# Altium PCB Arduino MEGA blank shield.pcbdoc
Units mil, origin at the board's own origin, x right, y up, seen from the top; angles counter-clockwise.
Board outline 4000 x 2100 mil, 2 copper layers (Top Layer, Bottom Layer); 8 components, 79 nets, 94 pads, 0 vias.
Unrouted connection lines stored in the file: 9.
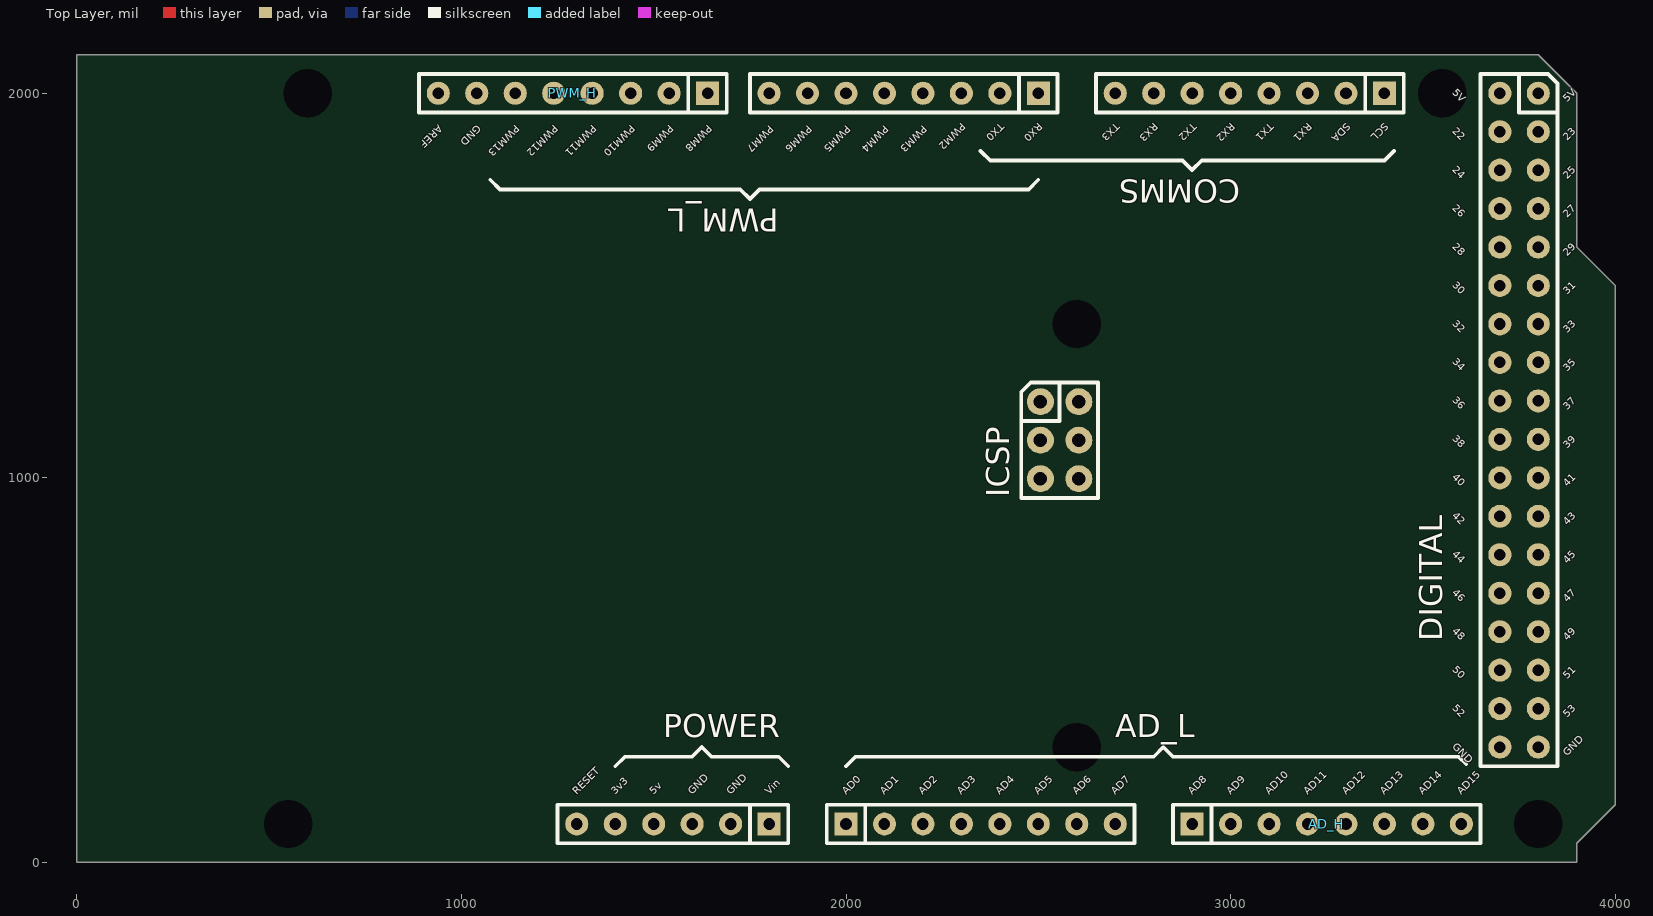
[diagram p0: Top Layer view]
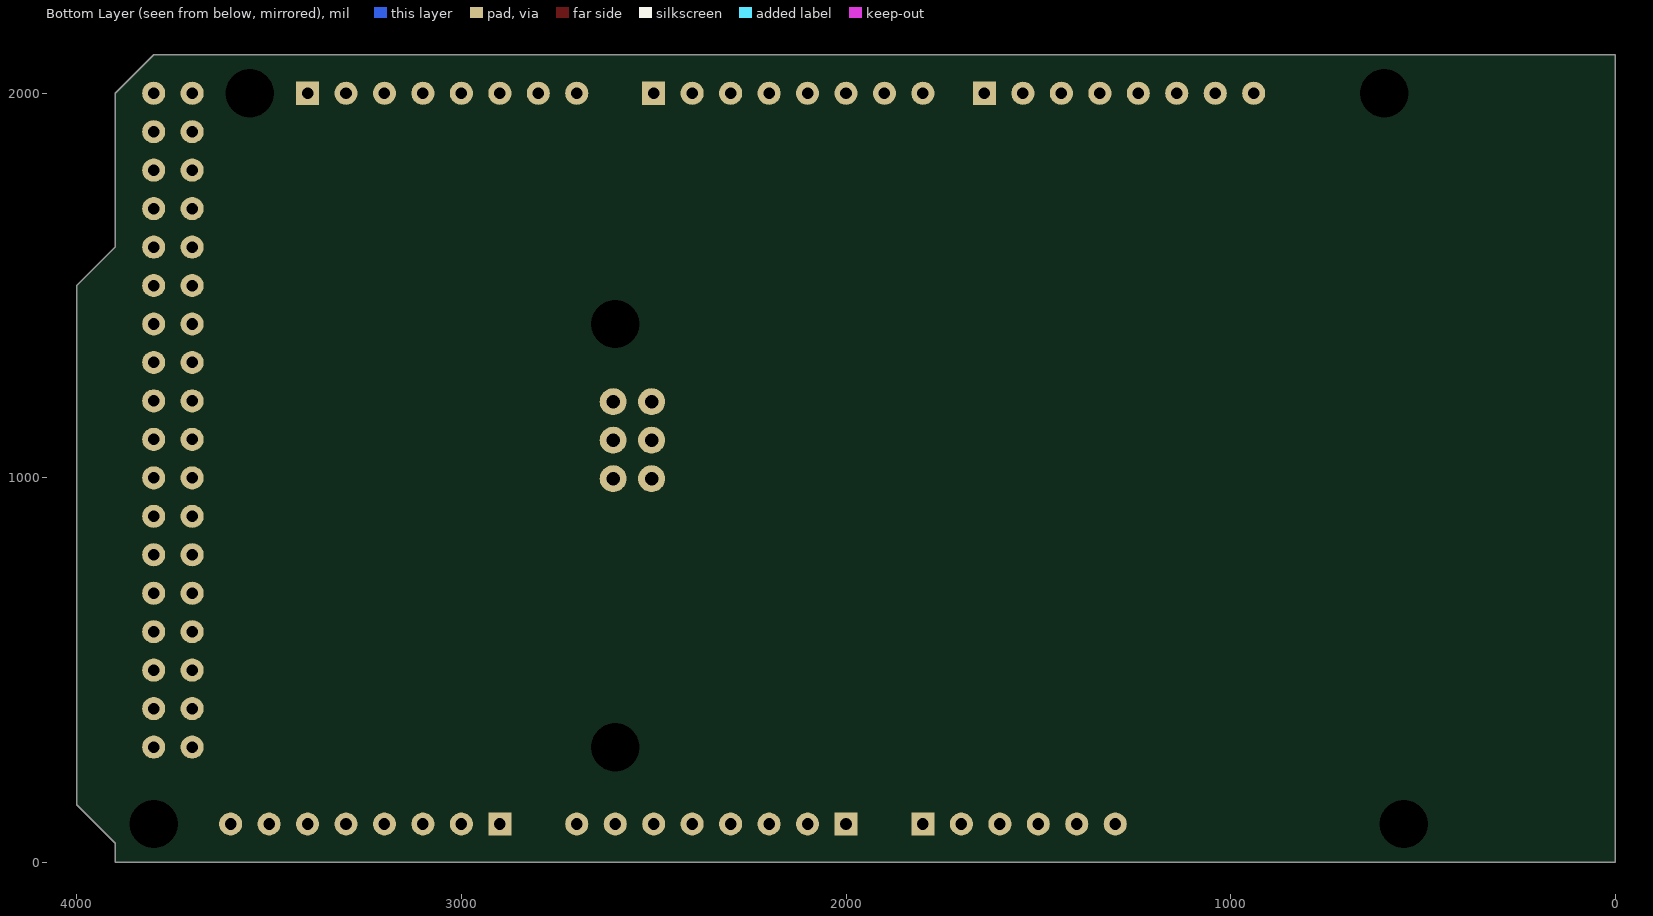
[diagram p1: Bottom Layer view, seen from below]

## Layer stack, top to bottom
Top Layer: signal copper 1.4
Dielectric: dielectric 12.6, FR-4, Dk 4.8
Bottom Layer: signal copper 1.4

## Board outline
0,0 0,2100 3800,2100 3900,2000 3900,1600 4000,1500 4000,150 3900,50 3900,0

## Design rules (kind name [scope] priority, off if disabled: settings)
Clearance [All] p1: gap=10
PolygonConnect [All] p1: connectstyle=Relief reliefconductorwidth=10 reliefentries=4 polygonreliefangle="90 Angle" airgapwidth=10
RoomDefinition AdruinoMegaSheild [InComponentClass('AdruinoMegaSheild')] p1: confinementstyle=ConfineOut formatcopy=TRUE lockcomponents=FALSE outline 4200,900 4750,900 4750,1080 4200,1080
RoutingVias [All] p1: holewidth=28 width=50 viastyle="Through Hole" minholewidth=28 minwidth=50 maxholewidth=28 maxwidth=50
SilkscreenOverComponentPads [All] p1: minsilkscreentomaskgap=10
SolderMaskExpansion [All] p1: expansion=4
Width [All] p1: maxlimit=10 minlimit=10 preferedwidth=10
27 further rules are at their usual default settings.

## Components (designator, comment, footprint, x,y, rotation, side; value= is the part's Value field where it differs from the comment)
AD_H "AD_H" "Header 8x1 8.5mm" 2900,100 r0 top locked
AD_L "AD_L" "Header 8x1 8.5mm" 2000,100 r0 top locked
COMMS "Communication" "Header 8x1 8.5mm" 3400,2000 r180 top
DIGITAL "IO_36" "HEADER 36X 8MM" 3800,2000 r270 top locked
ICSP "ICSP" ICSP 2505.51,1198.03 r0 top locked
POWER "POWER" "Header 6x1 8.5mm" 1800,100 r180 top locked
PWM_H "PWM_H" "Header 8x1 8.5mm" 1640,2000 r180 top locked
PWM_L "PWM_L" "Header 8x1 8.5mm" 2500,2000 r180 top locked

## Footprints (in the part's own frame and the unit in brackets; to place one, negate y for a bottom-side part, rotate by r counter-clockwise, add the part's x,y. Pads: shape width x height; smd on the part's side, far side on the other; paste and mask are expansions set on the pad)
"Header 6x1 8.5mm" [mil] "Stackable 6 pin header"
  rect 60x60 hole 30: 1(0,0)
  round 60 hole 30: 2(100,0) 3(200,0) 4(300,0) 5(400,0) 6(500,0)
  silkscreen extent -50,-50 550,50, body extent -50,-50 550,50, height 335
"Header 8x1 8.5mm" [mil] "Stackable 8 pin header"
  rect 60x60 hole 30: 1(0,0)
  round 60 hole 30: 2(100,0) 3(200,0) 4(300,0) 5(400,0) 6(500,0) 7(600,0) 8(700,0)
  silkscreen extent -50,-50 750,50, body extent -50,-50 750,50, height 335
"HEADER 36X 8MM" [mil] "Stackable 10 pin header"
  round 60 hole 30: 1(0,0) 2(0,-100) 3(100,0) 4(100,-100) 5(200,0) 6(200,-100) 7(300,0) 8(300,-100) 9(400,0) 10(400,-100) 11(500,0) 12(500,-100) 13(600,0) 14(600,-100) 15(700,0) 16(700,-100) 17(800,0) 18(800,-100) 19(900,-100) 20(900,0) 21(1000,0) 22(1000,-100) 23(1100,0) 24(1100,-100) 25(1200,0) 26(1200,-100) 27(1300,0) 28(1300,-100) 29(1400,0) 30(1400,-100) 31(1500,0) 32(1500,-100) 33(1600,0) 34(1600,-100) 35(1700,0) 36(1700,-100)
  silkscreen extent -50,-150 1750,50, body extent -50,-150 1750,50, height 335
ICSP [mil]
  round 70 hole 35.43: 1(0,0) 2(100,0) 3(0,-100) 4(100,-100) 5(0,-200) 6(100,-200)
  silkscreen extent -50,-250 150,50, body extent -50,-250 150,50, height 485

## Free pads (board coordinates)
  round 62.99 hole 125.98: 0(550,100) 0(600,2000) 0(2600,300) 0(2600,1400) 0(3550,2000) 0(3800,100)

## Nets (pads, with @x,y where several pads share a name; then routed paths per layer and width w, separated by ;. In a path a pad name is that pad's centre, name@x,y a point inside that pad or via, vN(x,y) a via of type N, cw(c..) or ccw(c..) an arc to the next point about the centre after c; other vN are vias at no path point)
3V3: POWER.5
5V: DIGITAL.1 DIGITAL.2 ICSP.2 POWER.4
AD0: AD_L.1
AD1: AD_L.2
AD2: AD_L.3
AD3: AD_L.4
AD4: AD_L.5
AD5: AD_L.6
AD6: AD_L.7
AD7: AD_L.8
AD8: AD_H.1
AD9: AD_H.2
AD10: AD_H.3
AD11: AD_H.4
AD12: AD_H.5
AD13: AD_H.6
AD14: AD_H.7
AD15: AD_H.8
AREF: PWM_H.8
GND: DIGITAL.35 DIGITAL.36 ICSP.6 POWER.2 POWER.3 PWM_H.7
IO22: DIGITAL.3
IO23: DIGITAL.4
IO24: DIGITAL.5
IO25: DIGITAL.6
IO26: DIGITAL.7
IO27: DIGITAL.8
IO28: DIGITAL.9
IO29: DIGITAL.10
IO30: DIGITAL.11
IO31: DIGITAL.12
IO32: DIGITAL.13
IO33: DIGITAL.14
IO34: DIGITAL.15
IO35: DIGITAL.16
IO36: DIGITAL.17
IO37: DIGITAL.18
IO38: DIGITAL.19
IO39: DIGITAL.20
IO40: DIGITAL.21
IO41: DIGITAL.22
IO42: DIGITAL.23
IO43: DIGITAL.24
IO44: DIGITAL.25
IO45: DIGITAL.26
IO46: DIGITAL.27
IO47: DIGITAL.28
IO48: DIGITAL.29
IO49: DIGITAL.30
IO50: DIGITAL.31
IO51: DIGITAL.32
IO52: DIGITAL.33
IO53: DIGITAL.34
MISO: ICSP.1
MOSI: ICSP.4
PWM2: PWM_L.3
PWM3: PWM_L.4
PWM4: PWM_L.5
PWM5: PWM_L.6
PWM6: PWM_L.7
PWM7: PWM_L.8
PWM8: PWM_H.1
PWM9: PWM_H.2
PWM10: PWM_H.3
PWM11: PWM_H.4
PWM12: PWM_H.5
PWM13: PWM_H.6
RESET: ICSP.5 POWER.6
RX0: PWM_L.1
RX1: COMMS.3
RX2: COMMS.5
RX3: COMMS.7
SCK: ICSP.3
SCL: COMMS.1
SDA: COMMS.2
TX0: PWM_L.2
TX1: COMMS.4
TX2: COMMS.6
TX3: COMMS.8
VIN: POWER.1

## Silkscreen, mask and mechanical layers (free items; w line width, h text height)
Top Overlay:
  lines w10: 1075,1775 1100,1750 1725,1750 1750,1725 1775,1750 2475,1750 2500,1775 ; 1400,250 1425,275 1600,275 1625,300 1650,275 1825,275 1850,250 ; 2000,250 2025,275 2800,275 2825,300 2850,275 3592.93,275 3612.7,255.23 ; 2350,1850 2375,1825 2875,1825 2900,1800 2925,1825 3400,1825 3425,1850
  text "5V" at 3575,2000 h20 r315
  text "5V" at 3875,1975 h20 r45
  text "PWM2" at 2300,1925 h20 r225
  text "TX0" at 2400,1925 h20 r225
  text "RX0" at 2500,1925 h20 r225
  text "TX3" at 2700,1925 h20 r225
  text "RX3" at 2800,1925 h20 r225
  text "TX2" at 2900,1925 h20 r225
  text "RX2" at 3000,1925 h20 r225
  text "TX1" at 3100,1925 h20 r225
  text "RX1" at 3200,1925 h20 r225
  text "SDA" at 3300,1925 h20 r225
  text "SCL" at 3400,1925 h20 r225
  text "AREF" at 940,1920 h20 r225
  text "GND" at 1040,1920 h20 r225
  text "PWM13" at 1140,1920 h20 r225
  text "PWM12" at 1240,1920 h20 r225
  text "PWM11" at 1340,1920 h20 r225
  text "PWM10" at 1440,1920 h20 r225
  text "PWM9" at 1540,1920 h20 r225
  text "PWM8" at 1640,1920 h20 r225
  text "PWM7" at 1800,1917.93 h20 r225
  text "PWM6" at 1900,1917.93 h20 r225
  text "PWM5" at 2000,1917.93 h20 r225
  text "PWM4" at 2100,1917.93 h20 r225
  text "PWM3" at 2200,1917.93 h20 r225
  text "22" at 3575,1900 h20 r315
  text "23" at 3875,1875 h20 r45
  text "24" at 3575,1800 h20 r315
  text "25" at 3875,1775 h20 r45
  text "26" at 3575,1700 h20 r315
  text "27" at 3875,1675 h20 r45
  text "28" at 3575,1600 h20 r315
  text "29" at 3875,1575 h20 r45
  text "30" at 3575,1500 h20 r315
  text "31" at 3875,1475 h20 r45
  text "32" at 3575,1400 h20 r315
  text "33" at 3875,1375 h20 r45
  text "34" at 3575,1300 h20 r315
  text "35" at 3875,1275 h20 r45
  text "36" at 3575,1200 h20 r315
  text "37" at 3875,1175 h20 r45
  text "38" at 3575,1100 h20 r315
  text "39" at 3875,1075 h20 r45
  text "40" at 3575,1000 h20 r315
  text "41" at 3875,975 h20 r45
  text "42" at 3575,900 h20 r315
  text "43" at 3875,875 h20 r45
  text "44" at 3575,800 h20 r315
  text "45" at 3875,775 h20 r45
  text "46" at 3575,700 h20 r315
  text "47" at 3875,675 h20 r45
  text "48" at 3575,600 h20 r315
  text "49" at 3875,575 h20 r45
  text "50" at 3575,500 h20 r315
  text "51" at 3875,475 h20 r45
  text "52" at 3575,400 h20 r315
  text "53" at 3875,375 h20 r45
  text "GND" at 3575,300 h20 r315
  text "GND" at 3875,275 h20 r45
  text "RESET" at 1300,175 h20 r45
  text "3v3" at 1400,175 h20 r45
  text "5v" at 1500,175 h20 r45
  text "GND" at 1600,175 h20 r45
  text "GND" at 1700,175 h20 r45
  text "Vin" at 1800,175 h20 r45
  text "AD0" at 2000,175 h20 r45
  text "AD1" at 2100,175 h20 r45
  text "AD2" at 2200,175 h20 r45
  text "AD3" at 2300,175 h20 r45
  text "AD4" at 2400,175 h20 r45
  text "AD5" at 2500,175 h20 r45
  text "AD6" at 2600,175 h20 r45
  text "AD7" at 2700,175 h20 r45
  text "AD8" at 2900,175 h20 r45
  text "AD9" at 3000,175 h20 r45
  text "AD10" at 3100,175 h20 r45
  text "AD11" at 3200,175 h20 r45
  text "AD12" at 3300,175 h20 r45
  text "AD13" at 3400,175 h20 r45
  text "AD14" at 3500,175 h20 r45
  text "AD15" at 3600,175 h20 r45
Mechanical 1:
  circle w5: c3800,100 r62.99
  circle w5: c3550,2000 r62.99
  circle w5: c2600,1400 r62.99
  circle w5: c550,100 r62.99
  circle w5: c2600,300 r62.99
  circle w5: c600,2000 r62.99
  lines w5: 0,0 0,2100 3800,2100 3900,2000 3900,1600 4000,1500 4000,150 3900,50 3900,0 0,0